# EAGLE board Pro-Micro-v11 (EAGLE 6.5.0)
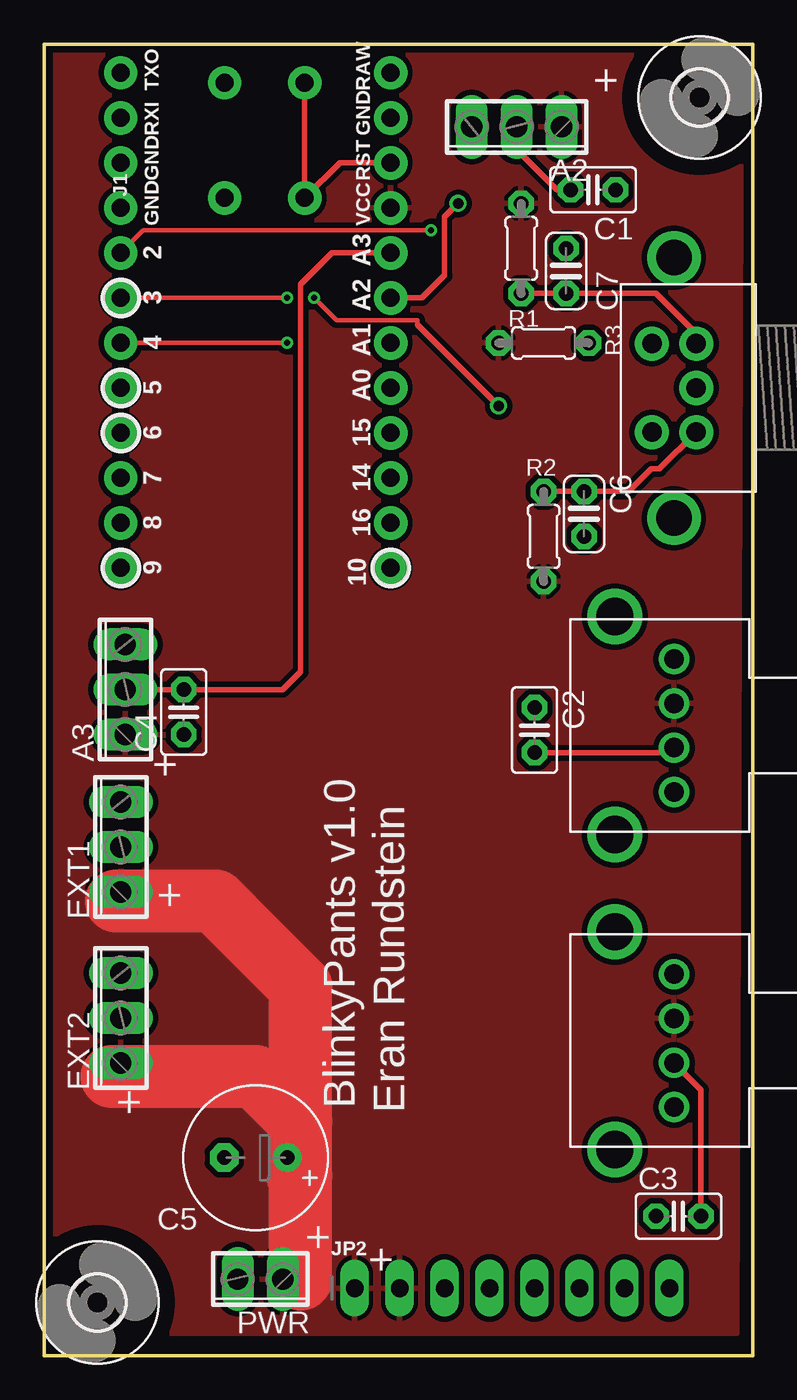
[diagram p0: board, top side]
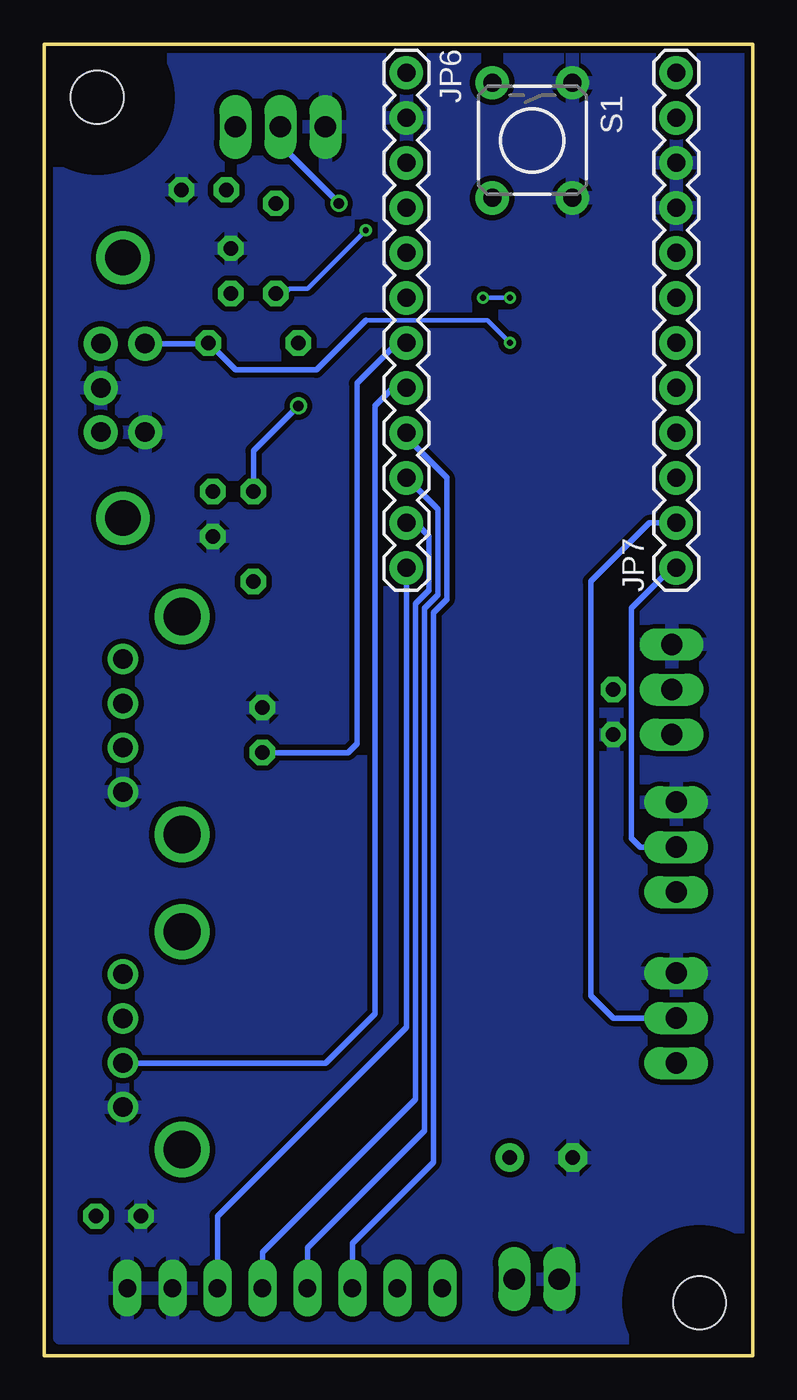
[diagram p1: board, bottom side, seen from below]

Size 40 x 74 mm. Coordinates in mm from the lower left corner, seen from the top.
Outline: 0,74 0,0 40,0 40,74 0,74
Copper layers (1*16): Top 0.0356mm / dielectric 1.5011mm / Bottom 0.0356mm
Design rules "oshpark_2layer *": minimum track width 6mil, minimum drill 13mil, track to track 6mil, track to pad 6mil, pad to pad 6mil, via to via 6mil, smd to smd 6mil, copper to edge 15mil, drill to drill 6mil, minimum pad ring 12mil, minimum via ring 7mil, stop-mask expansion 3mil, vias tented up to drill 20mil, thermal gap 10mil
Net classes: 0 default: width 0.254 mm; 1 vcc: width 0.635 mm

## Footprints (pad centres in the part's own frame; a part is rotated, then mirrored left to right if it is on the bottom)
3POL254 = drill 1.2 long: 1 -2.54,0; 2 0,0; 3 2.54,0
C025-025X050 = drill 0.813 octagon: 1 -1.27,0; 2 1.27,0
E3,5-8 = drill 0.813 pad 1.6: + -1.778,0 | drill 0.813 pad 1.6 octagon: - 1.778,0
C025-024X044 = drill 0.813 octagon: 1 -1.27,0; 2 1.27,0
3,0 = hole 3: 0,0
1X08_OVAL = drill 1 long: 1 -8.89,0; 2 -6.35,0; 3 -3.81,0; 4 -1.27,0; 5 1.27,0; 6 3.81,0; 7 6.35,0; 8 8.89,0
1X12 = drill 1.016 pad 1.88: 1 0,0; 2 2.54,0; 3 5.08,0; 4 7.62,0; 5 10.16,0; 6 12.7,0; 7 15.24,0; 8 17.78,0; 9 20.32,0; 10 22.86,0; 11 25.4,0; 12 27.94,0
2POL254 = drill 1.2 long: 1 -1.27,0; 2 1.27,0
0204/5 = drill 0.813 octagon: 1 -2.54,0; 2 2.54,0
TACTILE-PTH = drill 1.016 pad 1.88: 1 -3.251,2.261; 2 3.251,2.261; 3 -3.251,-2.261; 4 3.251,-2.261
P110KV1-1F15BR = drill 1.1: P$1 -3.75,0; P$2 -1.25,0; P$3 1.25,0; P$4 3.75,0 | drill 2.1: P$5 -6.15,3.35; P$6 6.15,3.35
EN11-VS* = drill 1.1 pad 1.93: A -2.5,-1.25; B 2.5,-1.25; C 0,-1.25; D -2.5,1.25; E 2.5,1.25 | drill 2: P$1 7.35,0; P$2 -7.35,0

## Placement (x,y rotation side)
A2  [3POL254]  26.67,69.34 180 top
A3  [3POL254]  4.57,37.59 90 top
C1  0.1uF  [C025-025X050]  30.99,65.79 180 top
C2  0.1uF  [C025-025X050]  27.69,35.31 270 top
C3  0.1uF  [C025-025X050]  35.81,7.87 0 top
C4  0.1uF  [C025-025X050]  7.87,36.32 90 top
C5  100uF  [E3,5-8]  11.94,11.18 180 top
C6  0.1uF  [C025-024X044]  30.48,47.5 90 top
C7  0.1uF  [C025-024X044]  29.46,61.21 270 top
EXT1  [3POL254]  4.32,28.7 90 top
EXT2  [3POL254]  4.32,19.05 90 top
H1  MOUNT-HOLE3.0  [3,0]  3,3 0 top
H2  MOUNT-HOLE3.0  [3,0]  37,71 0 top
JP2  [1X08_OVAL]  26.42,3.81 0 top
JP6  [1X12]  19.56,72.39 270 bottom
JP7  [1X12]  4.32,44.45 90 bottom
PWR  [2POL254]  12.19,4.32 180 top
R1  47K  [0204/5]  26.92,62.48 270 top
R2  47K  [0204/5]  28.19,46.23 90 top
R3  47K  [0204/5]  28.19,57.15 180 top
S1  [TACTILE-PTH]  12.45,68.58 270 bottom
U$2  P110KV1-1F15BRP110KV1-1F15BR  [P110KV1-1F15BR]  35.56,35.56 90 top
U$3  EN11-VSM1AF20  [EN11-VS*]  35.56,54.61 90 top
U$4  P110KV1-1F15BRP110KV1-1F15BR  [P110KV1-1F15BR]  35.56,17.78 90 top

## Library data of the parts
A2 A3 EXT1 EXT2 PWR = con-phoenix-254; OC_FARNELL: unknown; OC_NEWARK: unknown
C1-C7 R1-R3 = rcl
H1 H2 = holes
JP2 = microbuilder
JP6 JP7 = SparkFun
S1 = SparkFun-Electromechanical
U$2 U$4 = keves
U$3 = rotary-encoder

## Nets
A0: C3.2 JP6.8 U$4.P$2
A1: C2.2 JP6.7 U$2.P$2
A2: A2.2 C1.2 JP6.6
A3: A3.2 C4.2 JP6.5
D2: C7.2 JP7.8 R1.2 U$3.B
D3: C6.2 JP7.7 R2.2 U$3.A
D4: JP7.6 R3.1 U$3.E
D5: JP7.5
D6: JP7.4
D7: JP7.3
D8: EXT2.2 JP7.2
D9: EXT1.2 JP7.1
D10: JP2.6 JP6.12
GND [vcc]: A2.3 A3.3 C1.1 C2.1 C3.1 C4.1 C5.- C6.1 C7.1 EXT1.3 EXT2.3 JP2.7 JP2.8 JP6.2 JP7.9 JP7.10 PWR.2 S1.1 S1.2 U$2.P$1 U$3.C U$3.D U$4.P$1
MISO: JP2.4 JP6.10
MOSI: JP2.5 JP6.11
RAW [vcc]: JP6.1
RESET: JP6.3 S1.3 S1.4
RXI: JP7.11
SCK: JP2.3 JP6.9
TXO: JP7.12
VCC: A2.1 A3.1 C5.+ EXT1.1 EXT2.1 JP2.1 JP2.2 JP6.4 PWR.1 R1.1 R2.1 R3.2 U$2.P$3 U$4.P$3

## Tracks (layer width: path | path; a pad name or v marks a point on that pad's centre or on a via)
A0
  Top 0.305: C3.2 37.08,15.01 U$4.P$2
  Bottom 0.305: JP6.8 20.32,54.61 21.34,53.59 21.34,19.3 24.13,16.51 35.54,16.51 U$4.P$2
A1
  Top 0.305: C2.2 35.29,34.04 U$2.P$2
  Bottom 0.305: JP6.7 20.07,57.15 22.35,54.86 22.35,34.54 22.86,34.04 C2.2
A2  (via drill 0.6)
  Top 0.305: JP6.6 21.34,59.69 22.61,60.96 22.61,64.26 v23.37,65.02 | C1.2 28.96,65.79 26.67,68.07 A2.2
  Bottom 0.305: v23.37,65.02 26.67,68.33 A2.2
A3
  Top 0.305: A3.2 C4.2 13.46,37.59 14.48,38.61 14.48,60.45 16.26,62.23 JP6.5
D2  (via drill 0.33)
  Top 0.254: JP7.8 5.59,63.5 v21.84,63.5
  Top 0.305: U$3.B 36.81,57.68 34.54,59.94 C7.2 R1.2
  Bottom 0.254: v21.84,63.5 25.15,60.2 26.16,60.2 26.42,59.94 R1.2
D3  (via drill 0.33, 0.6)
  Top 0.254: v13.72,59.69 JP7.7 | v15.24,59.69 16.51,58.42 21.08,58.42 21.08,58.17
  Top 0.305: R2.2 C6.2 33.02,48.77 34.29,50.04 34.74,50.04 U$3.A | 21.08,58.17 v25.65,53.59
  Bottom 0.254: v15.24,59.69 v13.72,59.69
  Bottom 0.305: v25.65,53.59 28.19,51.05 R2.2
D4  (via drill 0.33)
  Top 0.254: v13.72,57.15 JP7.6 | R3.1 30.48,56.9
  Top 0.305: 30.77,57.11 R3.1
  Bottom 0.254: v13.72,57.15 14.99,58.42 21.84,58.42
  Bottom 0.305: U$3.E 30.77,57.11 R3.1 29.21,55.63 24.64,55.63 21.84,58.42
D8
  Bottom 0.305: JP7.2 5.84,46.99 9.14,43.69 9.14,20.32 7.87,19.05 EXT2.2
D9
  Bottom 0.305: JP7.1 4.57,44.45 6.86,42.16 6.86,29.21 6.35,28.7 EXT1.2
D10
  Bottom 0.305: JP6.12 19.56,18.54 30.23,7.87 JP2.6
GND
  pour Bottom (isolate 0.305): 1.27,1.02 39.12,1.02 39.12,73.41 0.76,73.41 0.76,1.02
MISO
  Bottom 0.305: JP6.10 17.78,47.75 17.78,42.93 18.54,42.16 18.54,12.7 25.15,6.1 JP2.4
MOSI
  Bottom 0.305: JP6.11 19.05,46.99 18.29,46.23 18.29,43.18 19.05,42.42 19.05,14.48 27.69,5.84 JP2.5
RESET
  Top 0.305: S1.3 S1.4 16.69,67.31 JP6.3
SCK
  Bottom 0.305: JP6.9 19.56,51.82 17.27,49.53 17.27,42.67 18.03,41.91 18.03,10.92 22.61,6.35 JP2.3
VCC
  Top 1.778: PWR.1 13.72,3.56 14.48,4.32 | 13.46,9.91 C5.+ 13.97,9.65 14.48,10.16 | EXT1.1 4.06,25.65 | EXT2.1 4.32,16 4.06,15.75
  Top 3.556: 14.48,4.32 14.48,10.16 14.48,13.21 | 14.48,13.21 11.94,15.75 4.06,15.75 3.81,15.75 | 14.48,13.21 14.48,20.83 9.65,25.65 4.06,25.65
  pour Top (isolate 0.305): 0.51,73.66 39.37,73.66 39.12,1.27 0.51,1.27

## Text on the board
tPlace: TXO | RAW | RXI | GND | GND | RST | J1 | GND | VCC | 2 | A3 | 3 | A2 | 4 | A1 | 5 | A0 | 6 | 15 | 7 | 14 | 8 | 16 | 9 | 10
tNames: + | + | + | BlinkyPants v1.0 | Eran Rundstein | + | + | +